# Altium PCB RTC 1307.PcbDoc
Units mm, origin at the board's own origin, x right, y up, seen from the top; angles counter-clockwise.
Board outline 152.4 x 101.6 mm, 2 copper layers (Top Layer, Bottom Layer); 4 components, 8 nets, 17 pads, 4 vias.
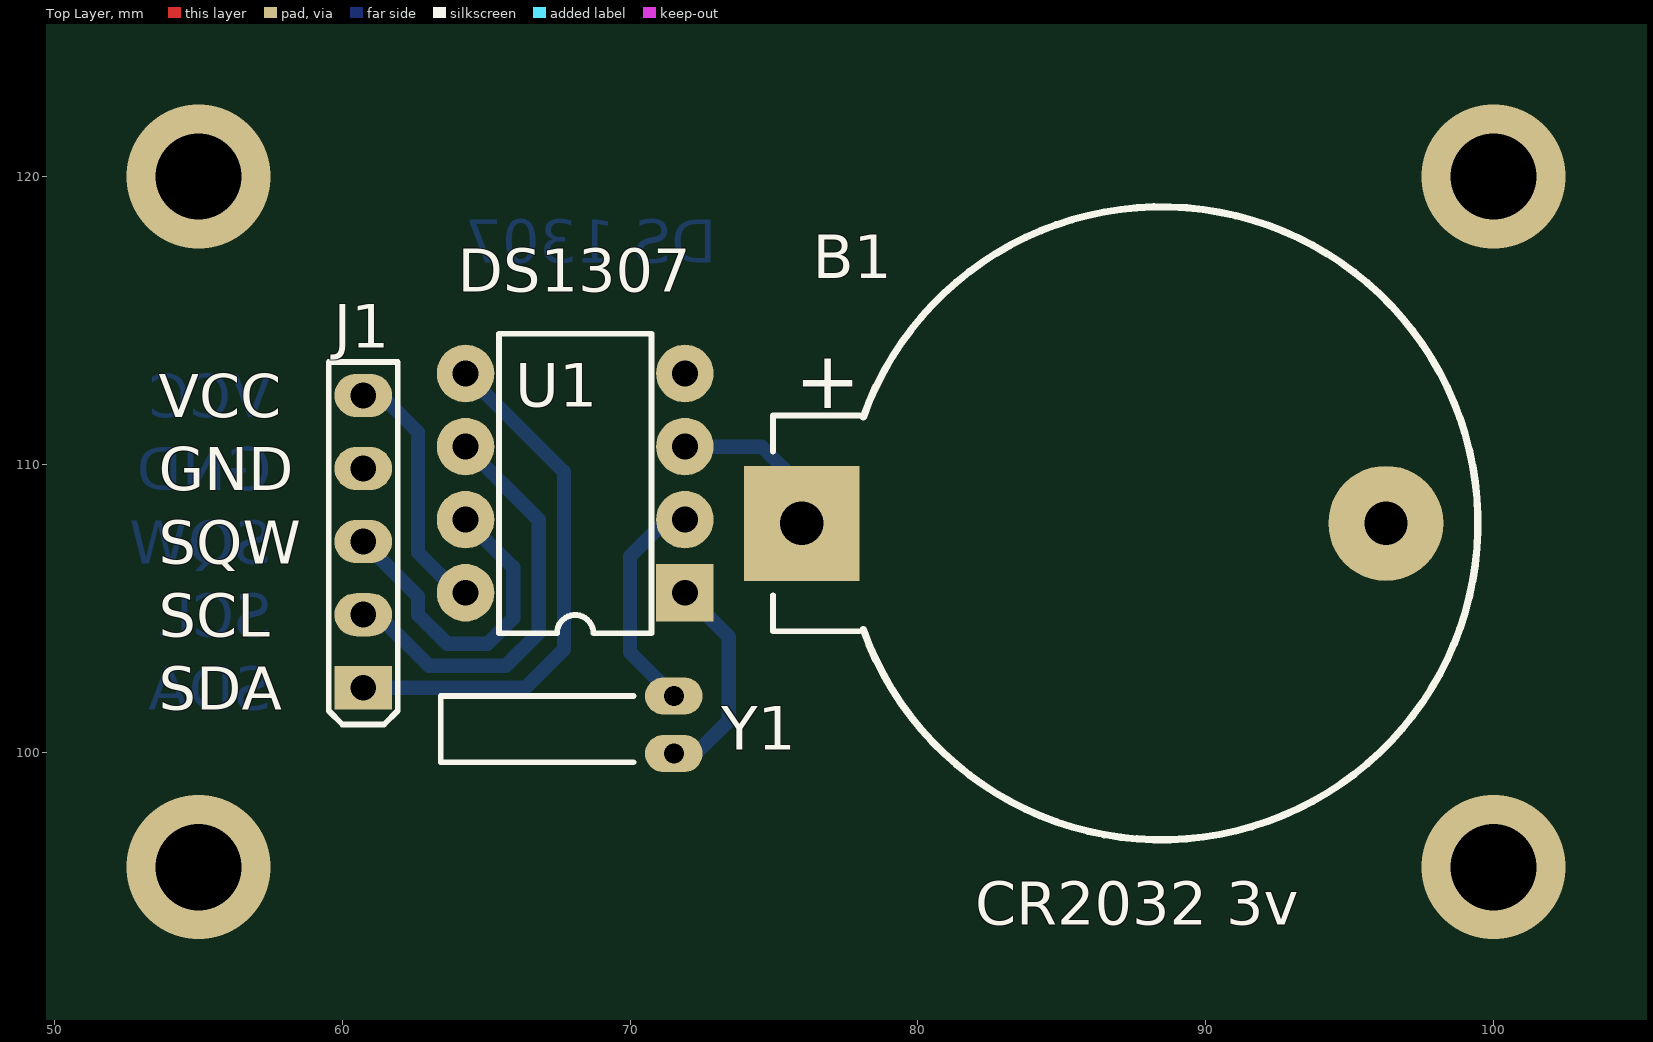
[diagram p0: Top Layer view]
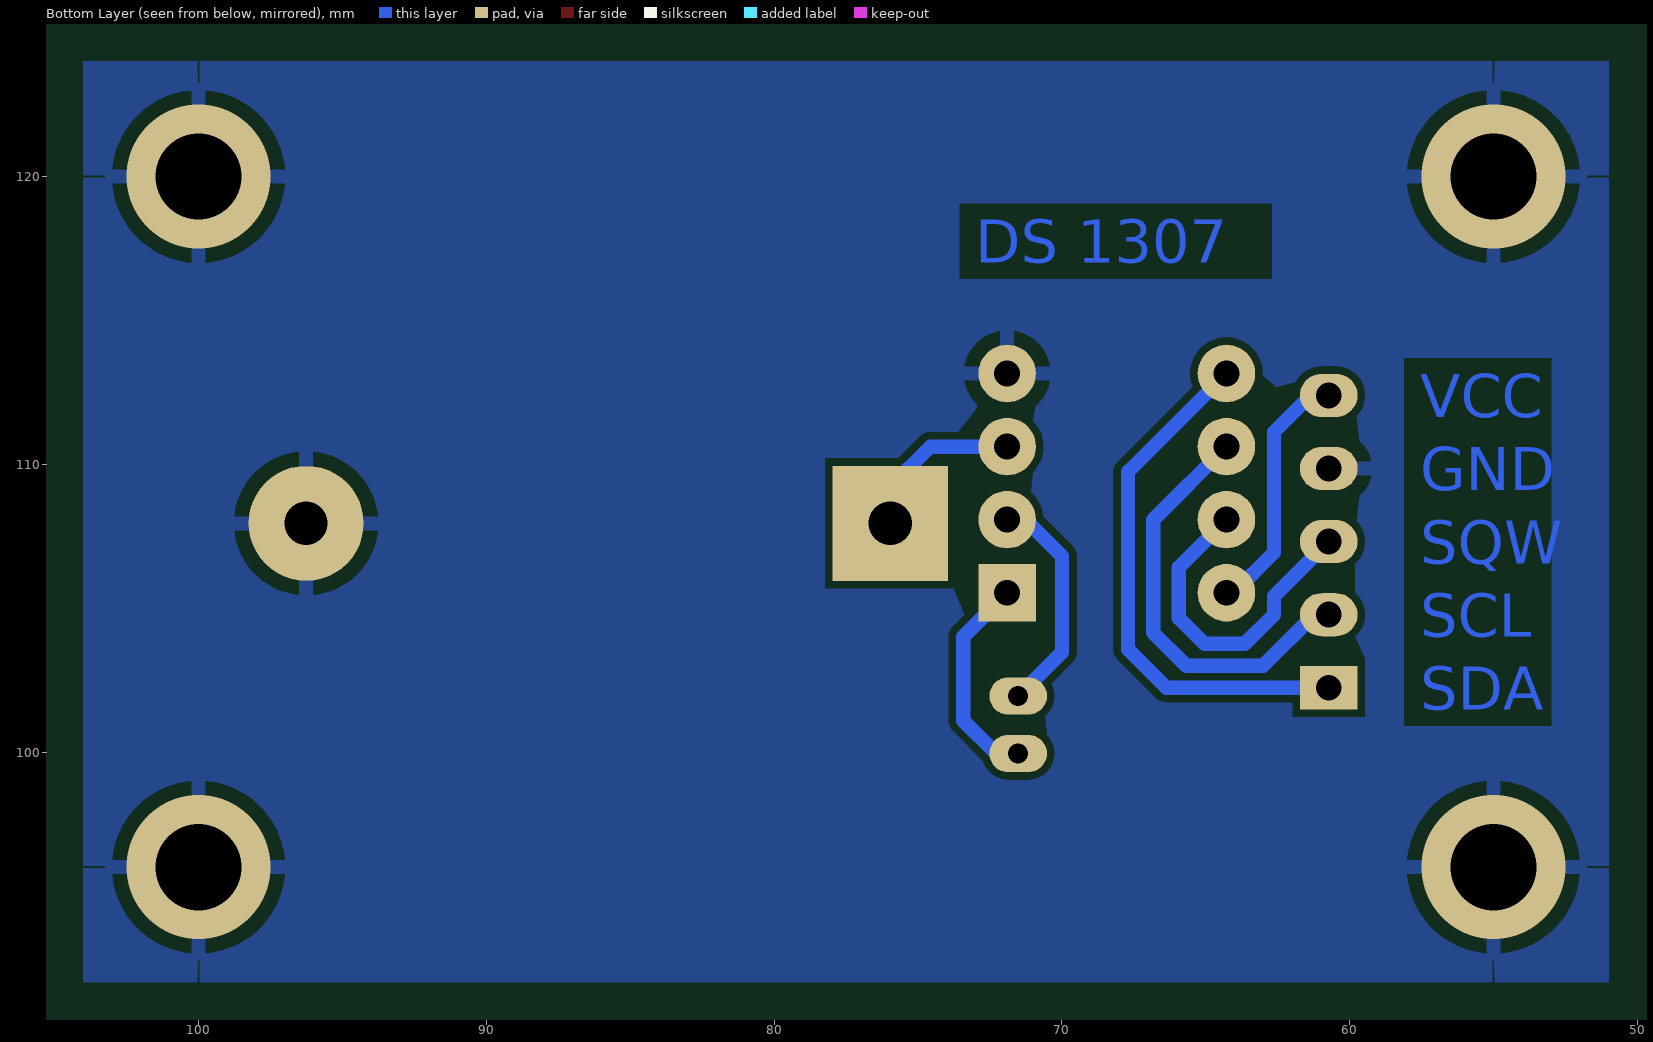
[diagram p1: Bottom Layer view, seen from below]
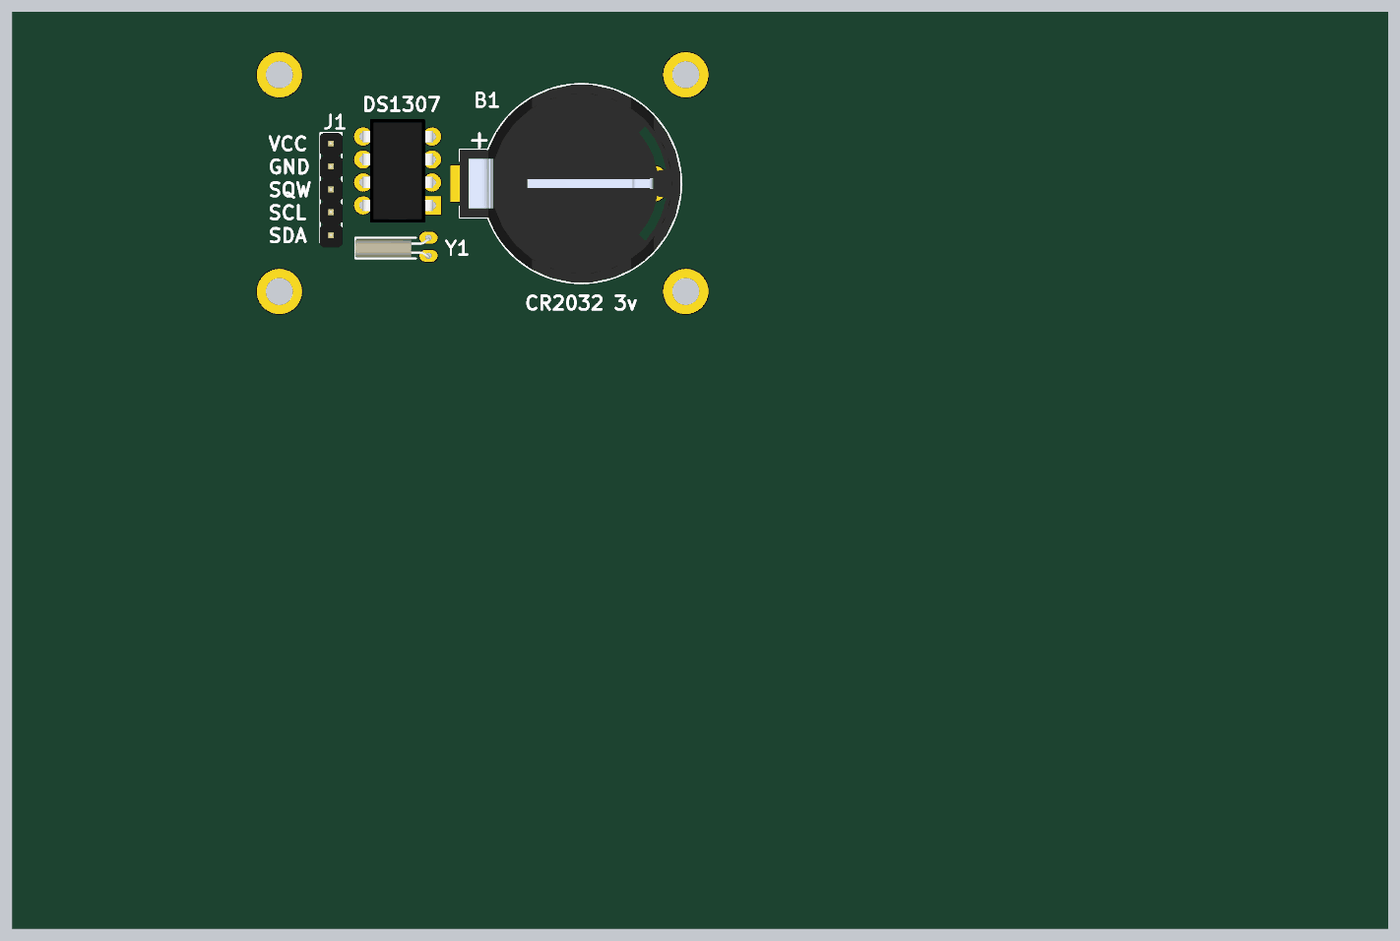
[diagram p2: 3D render of the assembled board from above, using the file's embedded part models]

## Layer stack, top to bottom
Top Solder: solder mask 0.0102, Solder Resist, Dk 3.5
Top Layer: signal copper 0.0356
Dielectric 1: dielectric 0.32, FR-4, Dk 4.8
Bottom Layer: signal copper 0.0356
Bottom Solder: solder mask 0.0102, Solder Resist, Dk 3.5

## Board outline
25.4,25.4 177.8,25.4 177.8,127 25.4,127

## Design rules (kind name [scope] priority, off if disabled: settings)
Clearance [All] p1: gap=0.254
PlaneConnect [All] p1: planeconnectstyle=Relief reliefexpansion=0.508 reliefentries=4 reliefconductorwidth=0.254 reliefairgap=0.5
PolygonConnect [All] p1: connectstyle=Relief reliefconductorwidth=0.5 reliefentries=4 polygonreliefangle="90 Angle" airgapwidth=0.5
RoutingVias [All] p1: holewidth=0.711 width=1.27 viastyle="Through Hole" minholewidth=0.711 minwidth=1.27 maxholewidth=0.711 maxwidth=1.27
SolderMaskExpansion [All] p1: expansion=0.102
Width [All] p1: maxlimit=2 minlimit=0.2 preferedwidth=0.5
28 further rules are at their usual default settings.

## Components (designator, comment, footprint, x,y, rotation, side; value= is the part's Value field where it differs from the comment)
B1 "3V Bat" "CR2032 DIP" 75.962,107.95 r0 top
J1 "connector" "Line 2.54 x 5" 60.722,102.235 r180 top
U1 "DS1307" DIP-8 71.898,105.537 r90 top
Y1 "XTAL" "XTAL - Clock R" 71.517,99.949 r90 top

## Footprints (in the part's own frame and the unit in brackets; to place one, negate y for a bottom-side part, rotate by r counter-clockwise, add the part's x,y. Pads: shape width x height; smd on the part's side, far side on the other; paste and mask are expansions set on the pad)
"CR2032 DIP" [mm]
  rect 4x4 hole 1.5: 1(0,0)
  round 4 hole 1.5: 2(20.3,0)
  silkscreen extent -1,-11 23.5,11, body extent -1,-11 23.5,11, height 8.5
DIP-8 [mm] "DIP; 8 Leads; Row Spacing 7.62 mm; Pitch 2.54 mm"
  rect 2x2 hole 0.9: 1(0,0)
  round 2 hole 0.9: 2(2.54,0) 3(5.08,0) 4(7.62,0) 5(7.62,7.62) 6(5.08,7.62) 7(2.54,7.62) 8(0,7.62)
  silkscreen extent -1.41,1.16 9,6.46, body extent -1.9,-0.14 9.53,7.74, height 4.19
"Line 2.54 x 5" [mm]
  rect 2x1.5 hole 0.9: 1(0,0)
  oval 2x1.5 hole 0.9: 2(0,-2.54) 3(0,-5.08) 4(0,-7.62) 5(0,-10.16)
  silkscreen extent -1.2,-11.32 1.2,1.28, body extent -1.25,-11.33 1.25,1.37, height 8.2
"XTAL - Clock R" [mm]
  oval 1.3x2 hole 0.7: 1(0,0) 2(2,0)
  silkscreen extent -0.3,1.4 2,8.1, body extent -0.3,-0.17 2,8.17, height 1.95

## Part data
B1: library part Battery, "Battery"
J1: library part PLS-5, "Vert, Sgl line, Male"
U1: library part "RTC DS1307", "(RTC) Real Time Clock"
Y1: "Crystal Oscillator"

## Via types
v1: diameter 5, hole 3, Top Layer to Bottom Layer, 4 vias

## Nets (pads, with @x,y where several pads share a name; then routed paths per layer and width w, separated by ;. In a path a pad name is that pad's centre, name@x,y a point inside that pad or via, vN(x,y) a via of type N, cw(c..) or ccw(c..) an arc to the next point about the centre after c; other vN are vias at no path point)
GND: B1.2 J1.4 U1.4
  other v1: 55,96 100,96 55,120 100,120
NetB1_1: B1.1 U1.3 | length 5.9
  Bottom Layer w0.5: U1.3 74.565,110.617 75.962,109.22 B1.1
NetU1_1: U1.1 Y1.1 | length 7.5
  Bottom Layer w0.5: Y1.1 72.279,99.949 73.422,101.092 73.422,104.013 U1.1
NetU1_2: U1.2 Y1.2 | length 7.9
  Bottom Layer w0.5: Y1.2 69.993,103.473 69.993,106.807 71.263,108.077 U1.2
RTC-SCL: J1.2 U1.6 | length 15.5
  Bottom Layer w0.5: J1.2@60.087,104.775 61.23,104.775 63.008,102.997 65.675,102.997 66.818,104.14 66.818,108.077 U1.6
RTC-SDA: J1.1 U1.5 | length 18.5
  Bottom Layer w0.5: J1.1 66.36,102.235 67.699,103.574 67.699,109.736 U1.5
RTC-SQWOUT: J1.3 U1.7 | length 11.5
  Bottom Layer w0.5: J1.3 62.627,105.41 62.627,104.775 63.643,103.759 65.04,103.759 65.929,104.648 65.929,106.426 U1.7
VCC: J1.5 U1.8 | length 8.9
  Bottom Layer w0.5: J1.5 61.357,112.395 62.627,111.125 62.627,106.934 64.024,105.537 U1.8

## Polygon pours and split planes (outlines as drawn)
GND on Bottom Layer "Top Layer-No Net" (solid, pour order 2): 104,92 104,124 51,124 51,92

## Other copper
Bottom Layer:
  text "DS 1307" at 73,117 h1.5
  text "VCC" at 57.547,111.633 h1.5
  text "GND" at 57.547,109.093 h1.5
  text "SQW" at 57.547,106.553 h1.5
  text "SCL" at 57.547,104.013 h1.5
  text "SDA" at 57.547,101.473 h1.5

## Silkscreen, mask and mechanical layers (free items; w line width, h text height)
Top Overlay:
  text "DS1307" at 64,116 h1.5
  text "VCC" at 53.61,111.633 h1.5
  text "GND" at 53.61,109.093 h1.5
  text "SQW" at 53.61,106.553 h1.5
  text "SCL" at 53.61,104.013 h1.5
  text "SDA" at 53.61,101.473 h1.5
  text "CR2032 3v" at 82,94 h1.5

## Text inside footprints (layer, text, board x,y; h text height)
B1: Top Overlay "+" at 75.712,111.95 h2